# Altium PCB PCB-Power-Managemet-pcb.PcbDoc
Units mm, origin at the board's own origin, x right, y up, seen from the top; angles counter-clockwise.
Board outline 99.48 x 99.65 mm, 2 copper layers (Top Layer, Bottom Layer), stack 1.41 mm thick; 27 components, 20 nets, 70 pads, 0 vias.
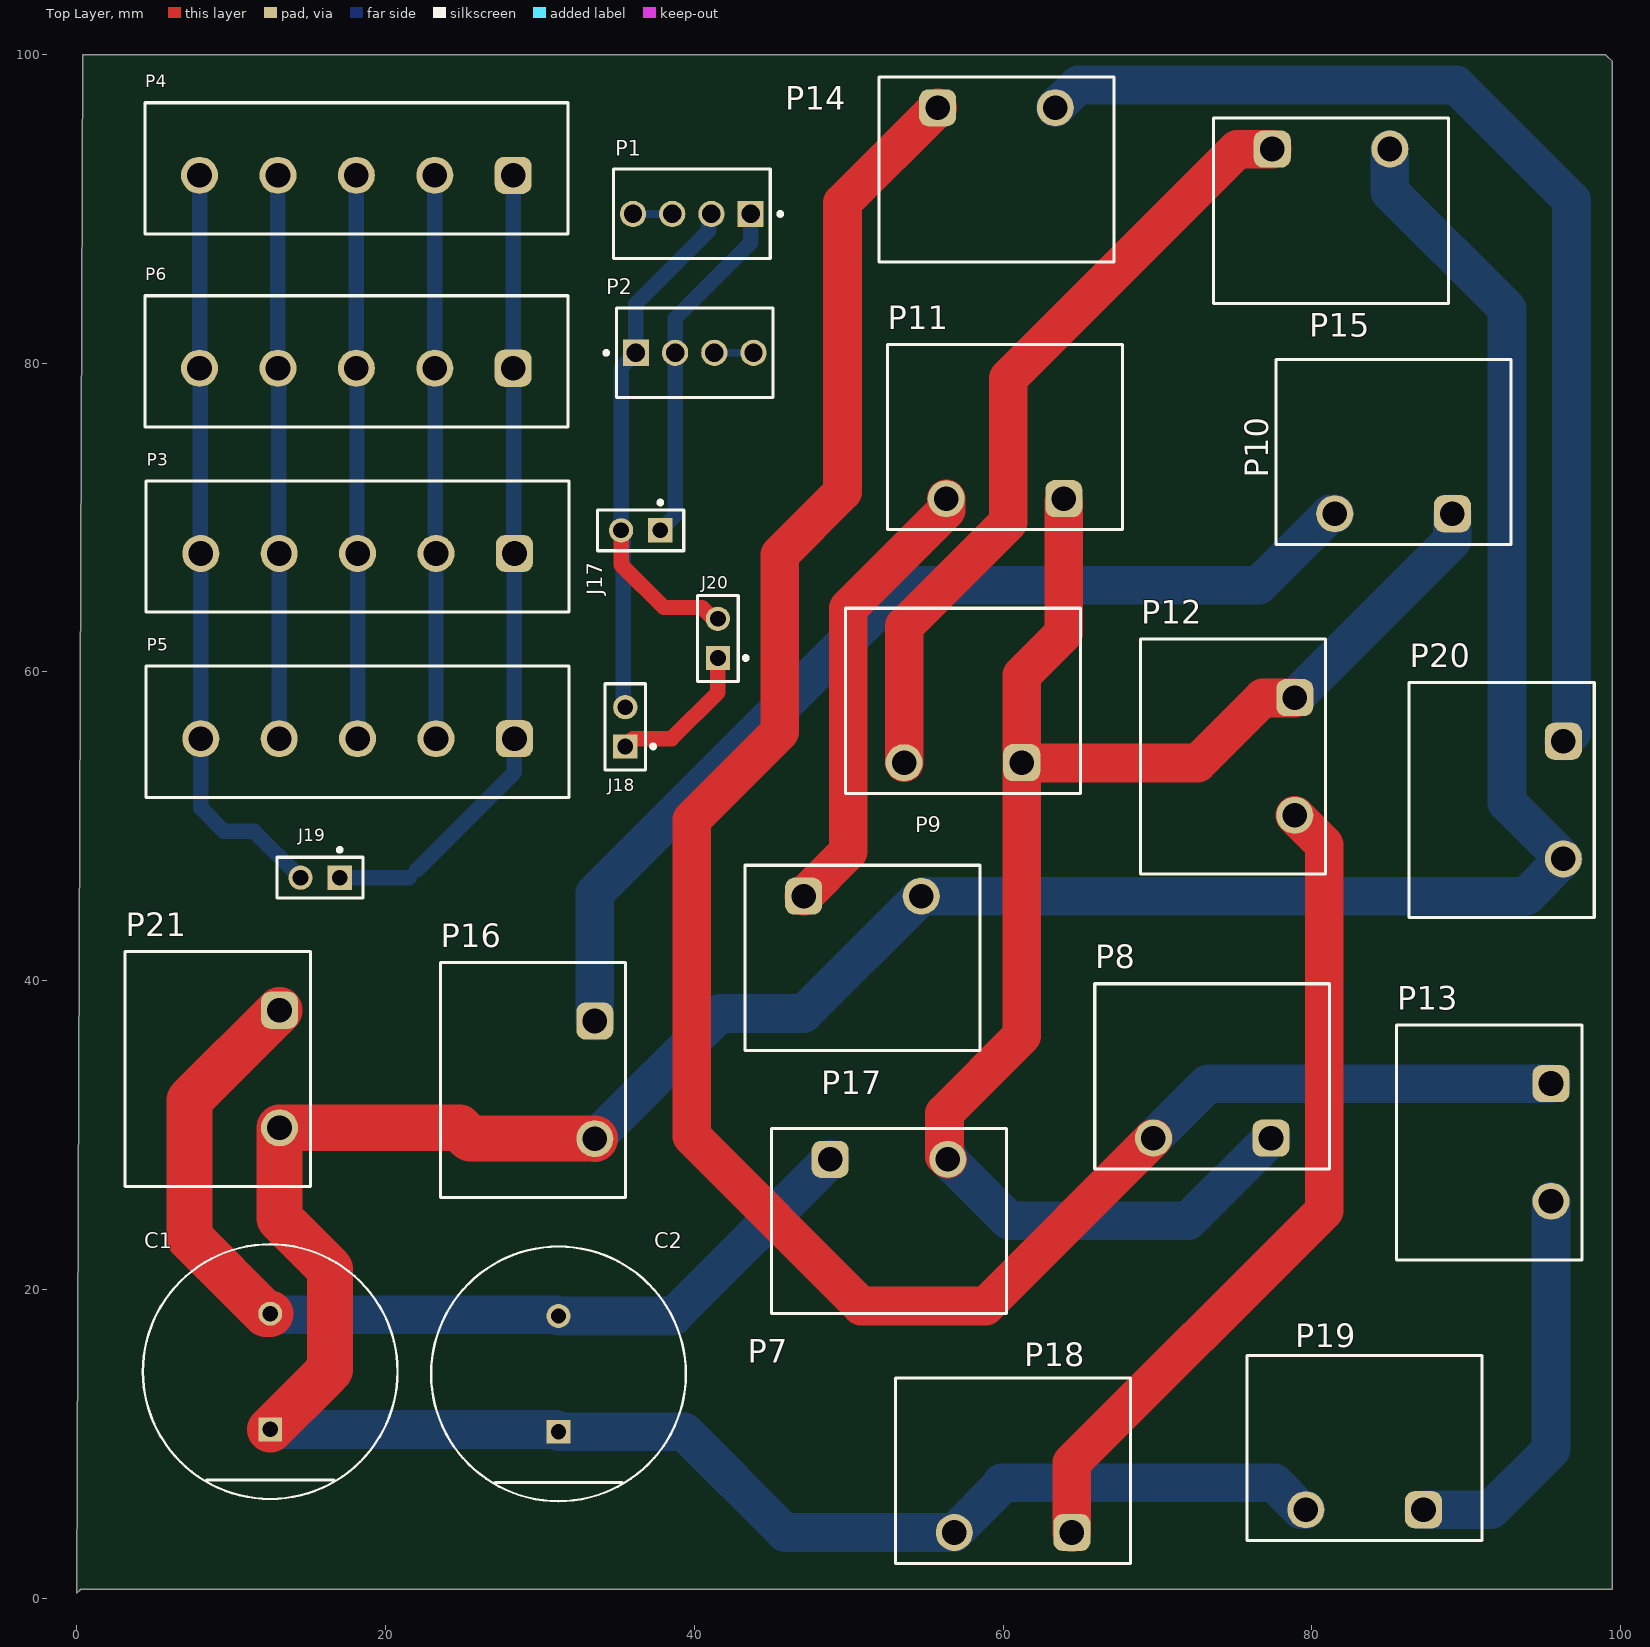
[diagram p0: Top Layer view]
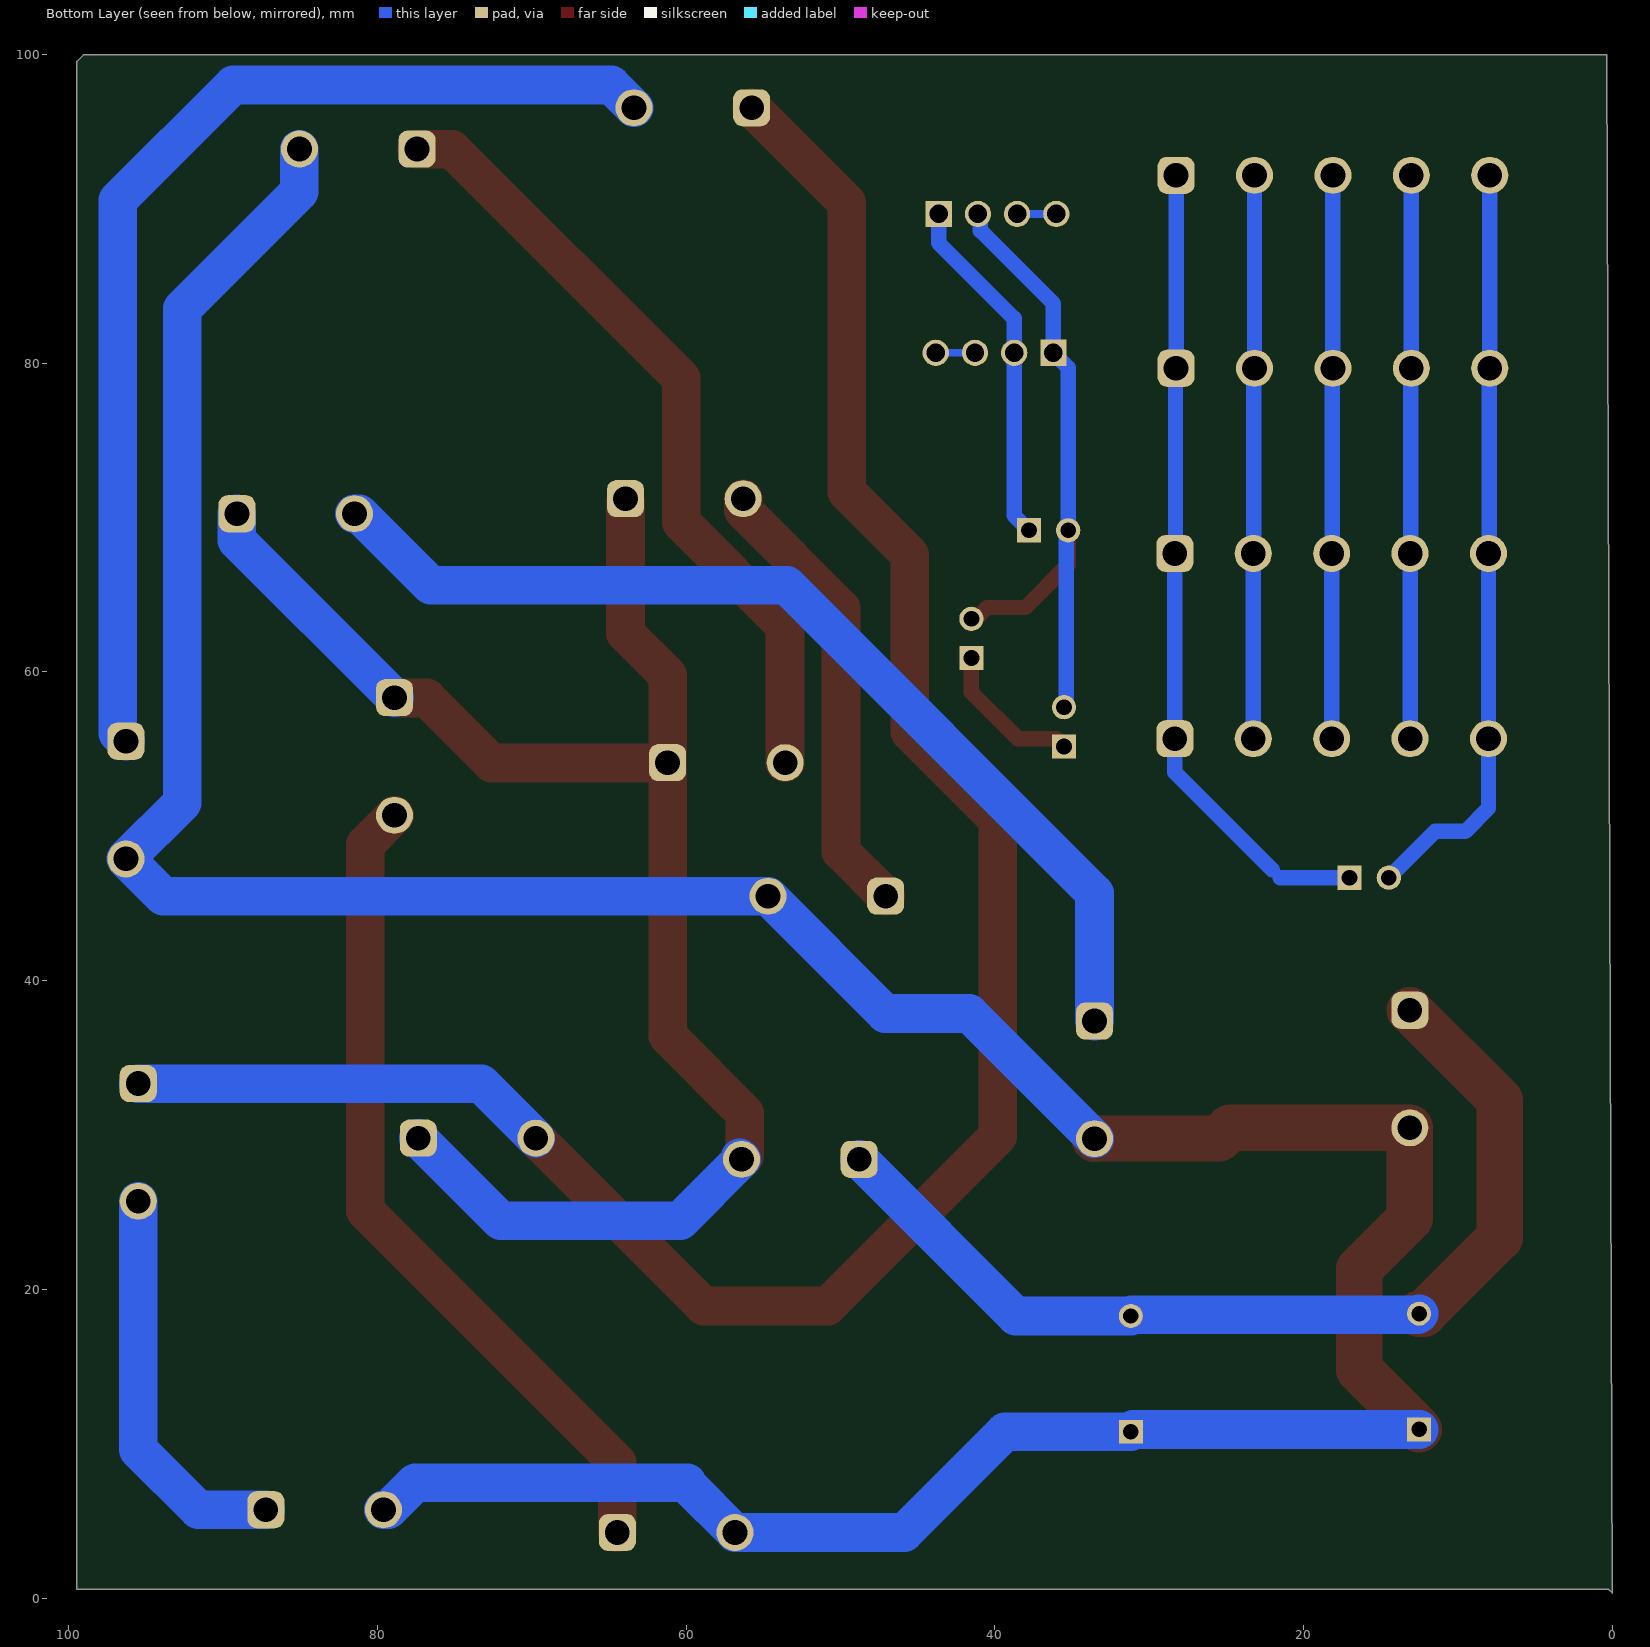
[diagram p1: Bottom Layer view, seen from below]
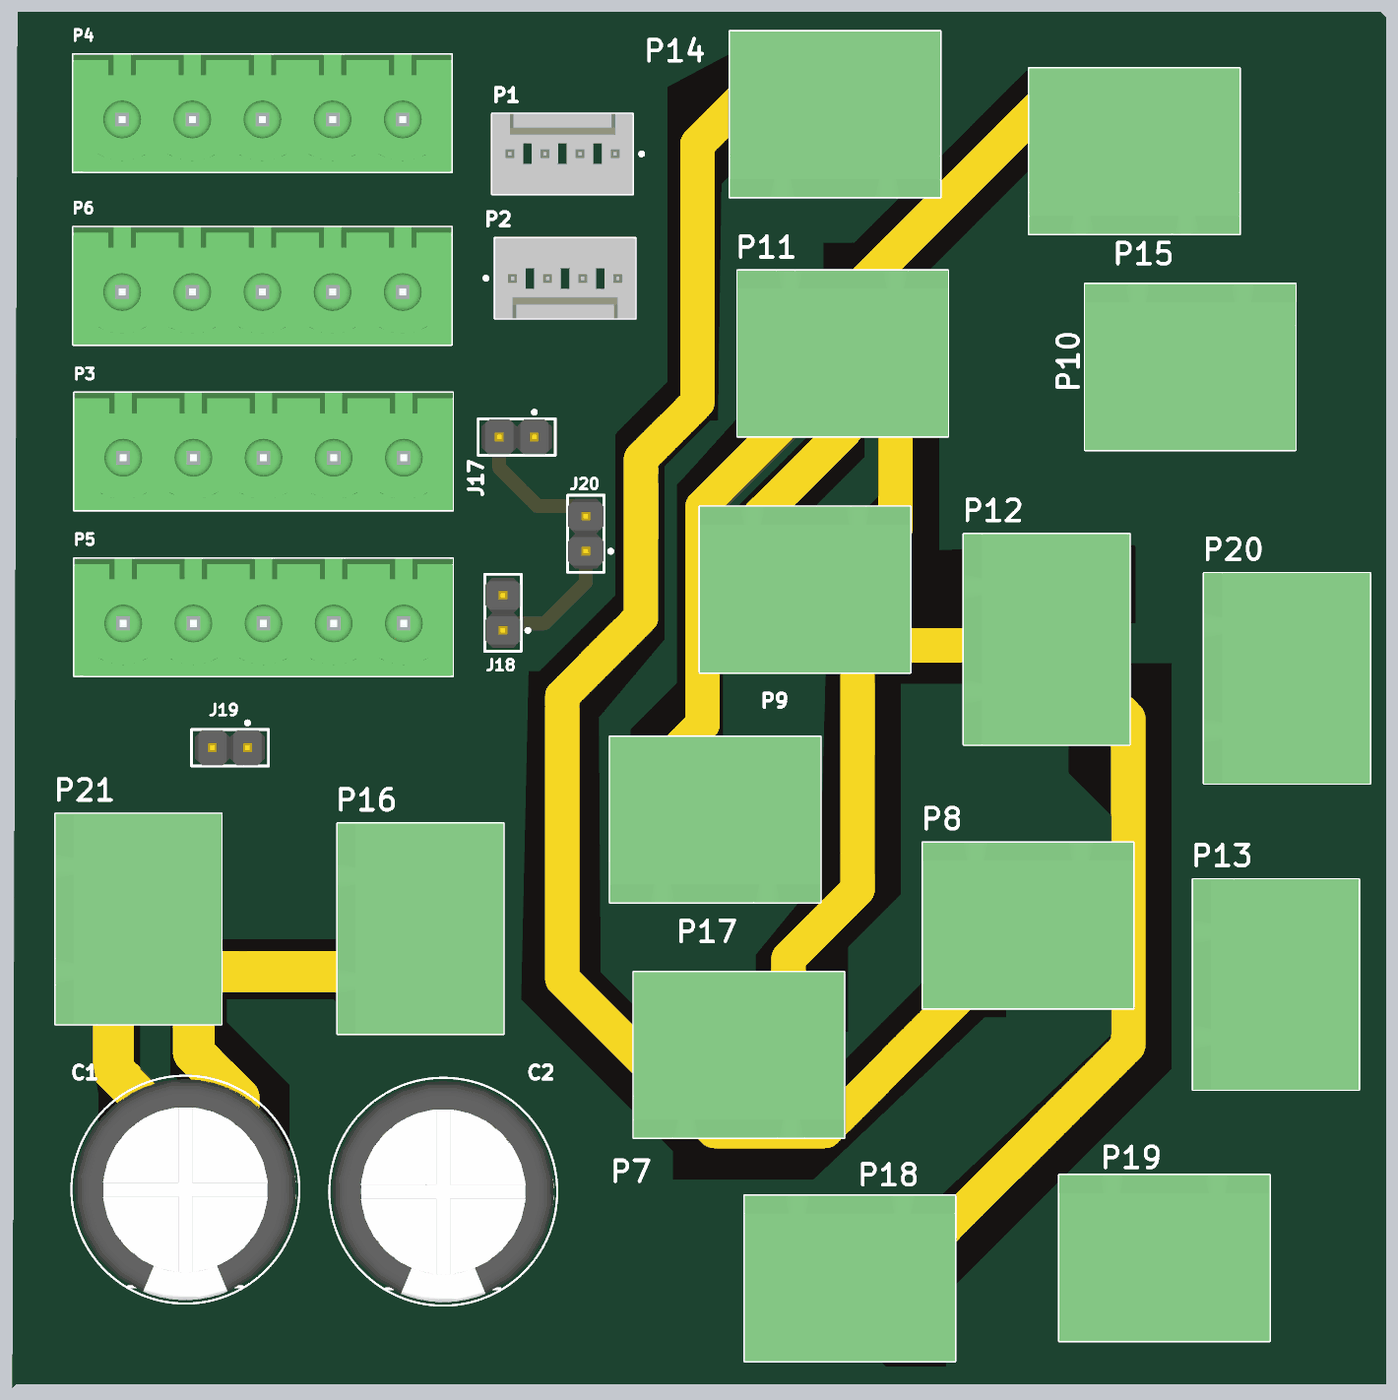
[diagram p2: 3D render of the assembled board from above, using the file's embedded part models]

## Layer stack, top to bottom
Top Solder: solder mask 0.0102, Solder Resist, Dk 3.5
Top Layer: signal copper 0.105
Dielectric 1: dielectric 1.2, FR-4, Dk 4.8
Bottom Layer: signal copper 0.105
Bottom Solder: solder mask 0.0102, Solder Resist, Dk 3.5

## Board outline
0,0.325 0.25,0.575 99.475,0.575 99.475,99.55 99.05,99.975 0.375,99.975

## Design rules (kind name [scope] priority, off if disabled: settings)
Clearance [All] p1: gap=0.3 ignorepadtopadclearanceinfootprint=FALSE
PolygonConnect [All] p1: connectstyle=Relief reliefconductorwidth=0.254 reliefentries=4 polygonreliefangle="90 Angle" airgapwidth=0.254
RoutingVias [All] p1: holewidth=1 width=1.2 viastyle="Through Hole" minholewidth=1 minwidth=1.2 maxholewidth=1 maxwidth=1.2
SilkToSolderMaskClearance [IsPad] p1: minsilkscreentomaskgap=0.2 clearancetoexposedcopper=TRUE
SolderMaskExpansion [All] p1: expansion=0.102 istentingtop=FALSE
Width [All] p1: maxlimit=3 minlimit=0.1 preferedwidth=2 bottomlayer_prefwidth=1 minimp=50.000000 maximp=50.000000 favimp=50.000000
29 further rules are at their usual default settings.

## Components (designator, comment, footprint, x,y, rotation, side; value= is the part's Value field where it differs from the comment)
C1 "cap01" FP-RAD-TH-D_16_0_5-L_25_2-MFG 12.525,14.675 r90 top
C2 "cap02" FP-RAD-TH-D_16_0_5-L_25_2-MFG 31.2,14.525 r90 top
J17 "Vcc" FP-M20-9990245-MFG 36.525,69.175 r180 top
J18 "Rel2" FP-M20-9990245-MFG 35.525,56.445 r90 top
J19 "VoltageSensor" FP-M20-9990245-MFG 15.755,46.675 r180 top
J20 "VoltageSensor" FP-M20-9990245-MFG 41.525,62.175 r90 top
P1 "Rel01" MOLX-22-27-2041_V 39.835,89.675 r0 top
P2 "VoltageSensor" MOLX-22-27-2041_V 40.025,80.675 r180 top
P3 "BMS" 691311500105 18.185,68.125 r180 top
P4 "battery" 691311500105 18.105,92.625 r180 top
P5 "beeper" 691311500105 18.185,56.125 r180 top
P6 "ex" 691311500105 18.105,80.125 r180 top
P7 "MainSwitch" 691313410002 52.61,24.425 r0 top
P8 "SubSwitch" 691313410002 73.55,33.8 r180 top
P9 "SW1" 691313410002 57.4,58.125 r180 top
P10 "SW3" 691313410002 85.3,74.25 r180 top
P11 "SW5" 691313410002 60.125,75.225 r180 top
P12 "SW7" 691313410002 74.9,54.525 r270 top
P13 "SW11" 691313410002 91.5,29.525 r270 top
P14 "SW13" 691313410002 59.575,92.55 r0 top
P15 "SW2" 691313410002 81.25,89.875 r0 top
P16 "SW4" 691313410002 29.55,33.575 r270 top
P17 "SW6" 691313410002 50.89,41.475 r0 top
P18 "SW8" 691313410002 60.65,8.25 r180 top
P19 "SW12" 691313410002 83.425,9.725 r180 top
P20 "SW14" 691313410002 92.3,51.7 r270 top
P21 "PowerIN" 691313410002 9.125,34.275 r270 top

## Footprints (in the part's own frame and the unit in brackets; to place one, negate y for a bottom-side part, rotate by r counter-clockwise, add the part's x,y. Pads: shape width x height; smd on the part's side, far side on the other; paste and mask are expansions set on the pad)
691311500105 [mm] "5,08mm - PCB Headers - Vertical - Closed ends -05p"
  rrect50% 2.4x2.4 hole 1.6: 1(-10.16,0.45)
  round 2.4 hole 1.6: 2(-5.08,0.45) 3(0,0.45) 4(5.08,0.45) 5(10.16,0.45)
  silkscreen extent -13.7,-4.25 13.7,4.25, body extent -13.7,-4.25 13.7,4.25, height 12.05
691313410002 [mm] "7.62 mm - Closed Horizonal PCB Header - 2p"
  rrect50% 2.4x2.4 hole 1.6: 1(-3.81,4)
  round 2.4 hole 1.6: 2(3.81,4)
  silkscreen extent -7.61,-6 7.61,6, body extent -7.62,-6 7.62,6, height 8.55
FP-M20-9990245-MFG [mm]
  rect 1.57x1.57 hole 1.02 paste-1000 mask+0: 1(-1.27,0)
  round 1.57 hole 1.02 paste-1000 mask+0: 2(1.27,0)
  silkscreen extent -2.79,-1.92 2.79,1.32, body extent -2.89,-1.42 2.89,1.42, height 0.25
FP-RAD-TH-D_16_0_5-L_25_2-MFG [mm]
  rect 1.55x1.55 hole 1 paste-1000 mask+0: 1(-3.75,0)
  round 1.55 hole 1 paste-1000 mask+0: 2(3.75,0)
  silkscreen extent -8.25,-8.25 8.25,8.25, body extent -8.35,-8.35 8.35,8.35, height 0.25
MOLX-22-27-2041_V [mm] "CONN, 4-Leads, Body 10.16x5.8mm, Pitch 2.54mm"
  rect 1.7x1.7 hole 1.19: 1(3.81,0)
  round 1.7 hole 1.19: 2(1.27,0) 3(-1.27,0) 4(-3.81,0)
  silkscreen extent -5.08,-2.9 5.86,2.9, body extent -5.08,-2.9 5.08,2.9, height 11.7

## Part data
C1 C2: library part CMP-05427-000445-1, "Aluminum Electrolytic Capacitors (Radial Lead Type) 4700uF ±20% 16V", Capacitance=4.7mF, Case/Package=Radial, ESR (Equivalent Series Resistance)=14mR, Max Operating Temperature=105°C, Min Operating Temperature=-40°C, Package Quantity=100, Ripple Current=3.82A, Tolerance=20%, Voltage=16V, Construction=RADIAL, Contact Plating=Tin, Diameter=16mm, Height=25mm, Height - Seated (Max)=1.063inch, Impedance=14mR, Lead Diameter=0.8mm, Lead Pitch=7.5mm, Lead/Base Style=Straight, Length=25mm, Life (Hours)=10000Hour, Mount="Through Hole", Number of Pins=2, Packaging=Bulk, Radiation Hardening=No, REACH SVHC="No SVHC", Ripple Current (AC)=3.82A, RoHS Compliant=Yes, Series=FR, Termination=Radial, Voltage Rating=16V, Voltage Rating (DC)=16V
J17 J18 J19 J20: library part CMP-15831-000105-1, "CONN HEADER VERT 2POS 2.54MM", Case/Package=SIL, Color=Black, Contact Resistance=25mR, Current=3A, Flammability Rating="UL94 V-0", Insulation Resistance=10GR, Max Operating Temperature=105°C, Min Operating Temperature=-40°C, Package Quantity=1000, Voltage=50V, Voltage Rating (AC)=750V, Connector Type="Male Pin", Contact Finish - Mating=GOLD, Contact Material=Brass, Contact Mating Length=0.24inch, Contact Plating=Gold, Contact Shape=Square, Contact Type="Male Pin", Current Rating=3A, Depth=2.54mm, Fastening Type=Pull, Gender=Male, Height=0.12inch, Housing Color=Black, Housing Material=Nylon, Insulation Color=Black, Insulation Material=Nylon, Lead Pitch=2.54mm, Length=5.08mm, Mated Stacking Heights=16.54mm, Mating Cycles=300, Max Current Rating=3A, Mount="Through Hole", Number Of Contacts=2, Number of Poles=2, Number of Positions=2, Number Of Rows=1, Orientation=Straight, Packaging=Bulk, Pitch=2.54mm, Radiation Hardening=No, Reach SVHC Compliant=Yes, Series=M20, Termination=Solder, Weight=0.25lb, Width=0.25inch, Working Voltage=750V
P1 P2: library part CMP-2000-05243-1, "Male Header, Pitch 2.54 mm, 1 x 4 Position, Height 11.7 mm, Tail Length 3.56 mm, RoHS, Bulk", Current Rating=4A, Manufacturer=Molex, Operating Temperature=0degCto+75degC, Voltage Rating=250V, Contact Material=Tinplatedbrass, Datasheet URL=http://www.molex.com/pdm_docs/sd/022272041_sd.pdf, Datasheet Version="Rev. F, 06/2009", Housing Material=Nylon(UL94V-0), Manufacturer URL=http://www.molex.com/
P3 P4 P5 P6: library part CMP-1502-02149-2, Color=Green, Current=20A, Voltage=300V, Contact Material=Brass, Contact Plating=Tin, Gender=Male, Height=12mm, Lead Pitch=5.08mm, Length=8.5mm, Mount="Through Hole", NexarPartId=8917750, Number Of Contacts=5, Number of Levels=1, Number of Pins=5, Number of Positions Per Level=5, Number Of Rows=1, Orientation=Vertical, Packaging=Box, Pitch=5.08mm, REACH SVHC="No SVHC", RoHS=Compliant, Termination=Solder, Width=27.4mm
P7 P8 P9 P10 P11 P12 P13 P14 P15 P16 P17 P18 P19 P20 P21: library part CMP-1502-02424-2, Color=Green, Current=20A, Voltage=300V, Connector Type="PCB, Terminal Block", Contact Material=Brass, Gender=Male, Height=12mm, Lead Pitch=7.62mm, Length=12.5mm, Mount="Through Hole", NexarPartId=18818328, Number Of Contacts=2, Number of Levels=1, Number of Pins=2, Number of Positions Per Level=2, Number Of Rows=1, Packaging=Box, Pitch=7.62mm, REACH SVHC="No SVHC", RoHS=Compliant, Termination=Solder, Width=15.24mm

## Nets (pads, with @x,y where several pads share a name; then routed paths per layer and width w, separated by ;. In a path a pad name is that pad's centre, name@x,y a point inside that pad or via, vN(x,y) a via of type N, cw(c..) or ccw(c..) an arc to the next point about the centre after c; other vN are vias at no path point)
5V: J17.1 P1.1 P2.2 | length 22.9
  Bottom Layer w1: J17.1 38.755,70.135 P2.2 38.755,82.905 43.645,87.795 P1.1
B+: J19.1 P3.1 P4.1 P5.1 P6.1 | length 52.9
  Bottom Layer w0.381: 21.525,46.675 22.025,47.175
  Bottom Layer w1: J19.1 21.525,46.675 ; 22.025,47.175 28.345,53.495 P3.1 28.305,67.715 28.305,79.635 P6.1 P4.1
B-: J19.2 P3.5 P4.5 P5.5 P6.5 | length 49.4
  Bottom Layer w1: P4.5 P6.5 7.985,79.635 7.985,67.715 P3.5 P5.5 8.025,51.175 9.525,49.675 11.485,49.675 J19.2
C1+: P3.4 P4.4 P5.4 P6.4 | length 36.5
  Bottom Layer w0.3: P6.4 P6.4@13.065,79.635 ; P3.4@13.065,67.715 P3.4 ; P5.4@13.094,55.686 P5.4
  Bottom Layer w1: P6.4 P4.4 ; P3.4@13.065,67.715 P6.4@13.065,79.635 ; P5.4 P3.4
C2+: P3.3 P4.3 P5.3 P6.3 | length 36.5
  Bottom Layer w1: P4.3@18.097,92.167 P4.3 P6.3 18.145,79.635 18.145,67.715 P3.3 P5.3
C3+: P3.2 P4.2 P5.2 P6.2 | length 36.5
  Bottom Layer w1: P4.2 P6.2 23.225,79.635 23.225,67.715 P3.2 P5.2
GND: J17.2 J18.2 J20.2 P1.2 P2.1 | length 44.4
  Top Layer w1: J17.2 35.255,66.945 38.025,64.175 40.508,64.175 41.239,63.445 J20.2
  Bottom Layer w1: J18.2 35.39,57.85 35.39,69.04 J17.2 35.255,79.715 P2.1 36.215,83.865 40.946,88.596 40.946,89.516 P1.2
NetC1_1: C1.1 C2.1 P15.2 P16.2 P17.2 P18.2 P19.2 P20.2 P21.2 | length 236.1
  Top Layer w3: C1.1 16,14.4 16.4,14.8 16.4,21.325 13.125,24.6 P21.2 24.785,30.465 25.475,29.775 33.54,29.775 P16.2
  Bottom Layer w2.5: C1.1 31.05,10.925 C2.1 39.35,10.775 45.875,4.25 P18.2 59.925,7.335 59.925,7.463 77.562,7.463 79.3,5.725 P19.2 ; P16.2 41.66,37.875 47.1,37.875 P17.2 93.885,45.475 P20.2 92.65,51.54 92.65,83.525 85.06,91.115 P15.2
NetC1_2: C1.2 C2.2 P7.1 P21.1 | length 65
  Top Layer w3: C1.2 12.225,18.425 7.3,23.35 7.3,32.26 P21.1
  Bottom Layer w2.5: C1.2 12.6,18.35 31.125,18.35 C2.2 38.65,18.275 P7.1
NetP7_2: P7.2 P8.1 P9.1 P10.1 P11.1 P12.1 | length 106.3
  Top Layer w2.5: P7.2 56.205,28.64 56.205,31.421 61.21,36.426 61.21,59.776 63.935,62.501 P11.1@63.935,70.986 ; P9.1@61.234,54.101 72.61,54.101 76.82,58.311 P12.1@78.876,58.311
  Bottom Layer w2.5: P7.2@56.521,28.527 P7.2 60.395,24.45 72.01,24.45 P8.1 ; P12.1 89.11,68.545 P10.1
NetP8_2: P8.2 P13.1 P14.1 | length 139.4
  Top Layer w2.5: P14.1 49.6,90.385 49.6,71.675 45.525,67.6 45.525,56.125 39.825,50.425 39.825,29.925 50.825,18.925 58.865,18.925 P8.2
  Bottom Layer w2.5: P8.2 73.275,33.335 P13.1
NetP9_2: P9.2 P15.1 | length 51
  Top Layer w2.5: P9.2@53.6,54.125 53.6,62.975 60.325,69.7 60.325,79.025 75.175,93.875 P15.1
NetP10_2: P10.2 P16.1 | length 66.4
  Bottom Layer w2.5: P16.1 33.55,45.677 53.49,65.617 76.555,65.617 81.188,70.25 P10.2
NetP11_2: P11.2 P17.1 | length 29.6
  Top Layer w2.5: P17.1 49.975,48.37 49.975,64.125 56.315,70.465 P11.2
NetP12_2: P12.2 P18.1 | length 54
  Top Layer w2.5: P18.1 64.46,8.76 80.8,25.1 80.8,48.815 P12.2
NetP13_2: P13.2 P19.1 | length 26
  Bottom Layer w2.5: P19.1 91.6,5.725 95.5,9.625 P13.2
NetP14_2: P14.2 P20.1 | length 72.4
  Bottom Layer w2.5: P14.2 64.86,98.025 89.35,98.025 96.825,90.55 96.825,56.035 P20.1
Rel2-Signal: J18.1 J20.1 | length 9.7
  Top Layer w1: J18.1 36.025,55.675 38.525,55.675 41.525,58.675 J20.1
S1: P1.3 P1.4 | length 2.5
  Bottom Layer w0.5: P1.4 P1.3
S2: P2.3 P2.4 | length 2.5
  Bottom Layer w0.5: P2.3 P2.4

## Polygon pours and split planes (outlines as drawn)
NetP12_2 on Top Solder "NONET_L-01_P-001" (solid): 61.875,3.675 61.875,3.25 63.25,1.875 67.6,1.875 67.6,7.075 83.925,23.4 83.925,52.8 78.025,52.8 76.475,51.25 76.475,44.85 79.575,41.75 79.575,25.875 79.025,25.325 61.7,9.05
NetP7_2 on Top Solder "NONET_L-01_P-001" (solid): 62.725,72.8 62.725,64.9 59.15,61.325 58.475,37.35 53.825,31.675 53.825,26.5 54.3,26.025 54.375,26.1 60.525,26.1 60.525,32.25 64.325,36.05 64.325,51.3 74.075,51.3 78.475,55.7 81.325,55.7 81.325,61.3 81.275,61.35 79.525,61.3 67.1,61 67.1,72.75
NetP9_2 on Top Solder "NONET_L-01_P-001" (solid): 52.425,52.525 52.275,52.675 52.425,64.05 52.525,64.15 58.725,70.35 58.725,83.25 60.975,83.25 73.3,95.575 73.425,95.7 79.15,95.475 79.15,92.575 77.95,91.375 76.45,90.925 75.875,90.75 61.7,76.575 61.7,67.725 55.4,61.425 55.4,52.7
NetP11_2 on Top Solder "NONET_L-01_P-001" (solid): 54.363,72.625 57.75,72.625 57.95,72.625 57.95,70.525 51.45,64.025 51.45,46.8 47.15,42.5 44.75,42.5 44.75,48 48.1,51.35 48.1,65.725 48.675,66.3
NetP8_2 on Top Solder "NONET_L-01_P-001" (solid): 54.075,98.05 57.475,98.05 57.475,97.95 57.475,97.8 57.475,92.3 56.15,92.3 51.35,87.5 51.1,70.375 50.55,70.375 47.225,67.05 47.225,54.512 42.475,48.875 42.475,48.675 42.6,30.425 42.625,30.4 50.7,22.325 58.55,22.325 68.075,31.85 70.8,31.85 71.875,30.65 71.975,30.425 71.975,27.15 70.4,27.15 58,15.4 57.35,15.4 47.825,15.4 47.825,17.475 36.85,28.45 36.85,28.725 37.375,52.225 38.175,52.225 43.675,57.725 43.675,69.325 43.825,69.575 47.425,73.175 47.425,73.5 47.425,94.525
NetC1_1 on Top Solder "NONET_L-01_P-001" (solid): 11.275,11.675 11.275,9.95 11.275,9.775 12,9.775 16.35,9.775 16.35,10.05 20.075,14.1 20.075,14.475 20.075,22.275 15.525,26.825 15.525,28.45 23.25,28.45 25.05,26.65 34.95,26.65 34.95,32.525 34.675,32.8 13.075,32.8 11.45,30.9 11.45,30.625 11.45,22.925 11.725,22.925 14.9,19.75 14.9,15.575
NetC1_2 on Top Solder "NONET_L-01_P-001" (solid): 11.275,39.175 11.55,39.45 14.5,39.45 14.5,36.45 9.25,31.2 9.25,23.4 12.9,19.75 13.525,19.75 13.525,16.2 13.45,16.275 6.225,16.275 6.225,21.6 5.825,23.9 5.825,28.25 5.825,35.625
NetP8_2 on Bottom Solder "NONET_L-01_P-001" (solid): 67.325,35.85 67.25,28.625 70.65,28.625 74.15,32.125 82.6,32.125 84.7,30.025 98.3,30.025 98.3,35.525
NetP7_2 on Bottom Solder "NONET_L-01_P-001" (solid): 54.175,30.025 60.025,30.025 63.275,26.775 71.425,26.775 76.025,31.375 79.175,31.375 79.175,26.95 73.675,21.45 58.45,21.45 54.25,25.65
NetP14_2 on Bottom Solder "NONET_L-01_P-001" (solid): 61.4,94.85 61.5,94.75 61.6,94.85 70.975,94.85 72.775,96.65 88.675,96.65 88.675,95.55 94.95,89.275 94.85,89.175 94.85,54.275 98.725,54.275 98.825,54.375 98.825,93.575 97.075,93.575 91.1,99.55 61.4,99.55
NetP7_2 on Bottom Solder "NONET_L-01_P-001" (solid): 77.2,59.925 77.2,56.125 77.525,56.125 77.875,56.125 82.25,56.125 82.25,59.325 90.425,67.5 90.425,72.975 87.625,72.975 86.3,71.65 86.3,68.745
NetP10_2 on Bottom Solder "NONET_L-01_P-001" (solid): 36.075,40.075 36.075,37.502 34.673,36.1 33.15,36.1 30.85,36.1 30.85,47.225 34.9,51.275 36.5,51.275 53.6,68.375 53.85,68.125 76.375,68.125 80.75,72.5 83.85,72.5 83.85,68.675 77.775,62.6 67.7,62.6 67.375,62.925 67.275,62.825 55,62.825
NetC1_1 on Bottom Solder "NONET_L-01_P-001" (solid): 31.425,31.98 31.425,26.075 36.125,26.075 46.025,35.975 52.25,35.975 52.25,37.625 57.575,42.95 98.5,42.95 98.5,49.675 95.025,53.15 94.1,53.15 94.1,85.85 87.4,92.55 87.4,95.9 83,95.9 82.075,94.975 82.075,88.775 91.225,79.625 91.225,48.6 84.2,48.6 84.05,48.45 83.9,48.6 54.25,48.6 45.575,39.925 41.947,39.925
NetP13_2 on Bottom Solder "NONET_L-01_P-001" (solid): 93.075,28.225 93.25,28.225 97.975,28.225 97.975,8.4 92.825,3.25 84.95,3.25 84.95,7.975 84.95,8.6 85.175,8.6 90.825,8.6 90.825,10.175 92.825,12.175
NetC1_1 on Bottom Solder "NONET_L-01_P-001" (solid): 9.925,13.75 9.925,6.35 39.425,6.35 44.35,1.425 44.4,1.475 59.325,1.475 59.325,3.4 62.275,6.35 73.7,6.35 78.3,2.1 78.7,2.1 82.825,2.1 82.825,9.7 81.664,10.861
NetC1_2 on Bottom Solder "NONET_L-01_P-001" (solid): 9.937,21.638 9.937,16.075 40.925,16.075 51.9,27.05 51.9,31.55 46.05,31.55 36.6,22.1